# Altium PCB pcb.PcbDoc
Units mil, origin at the board's own origin, x right, y up, seen from the top; angles counter-clockwise.
Board outline 1250 x 3750 mil, 2 copper layers (Top Layer, Bottom Layer), stack 60.477 mil thick; 9 components, 36 nets, 96 pads, 102 vias.
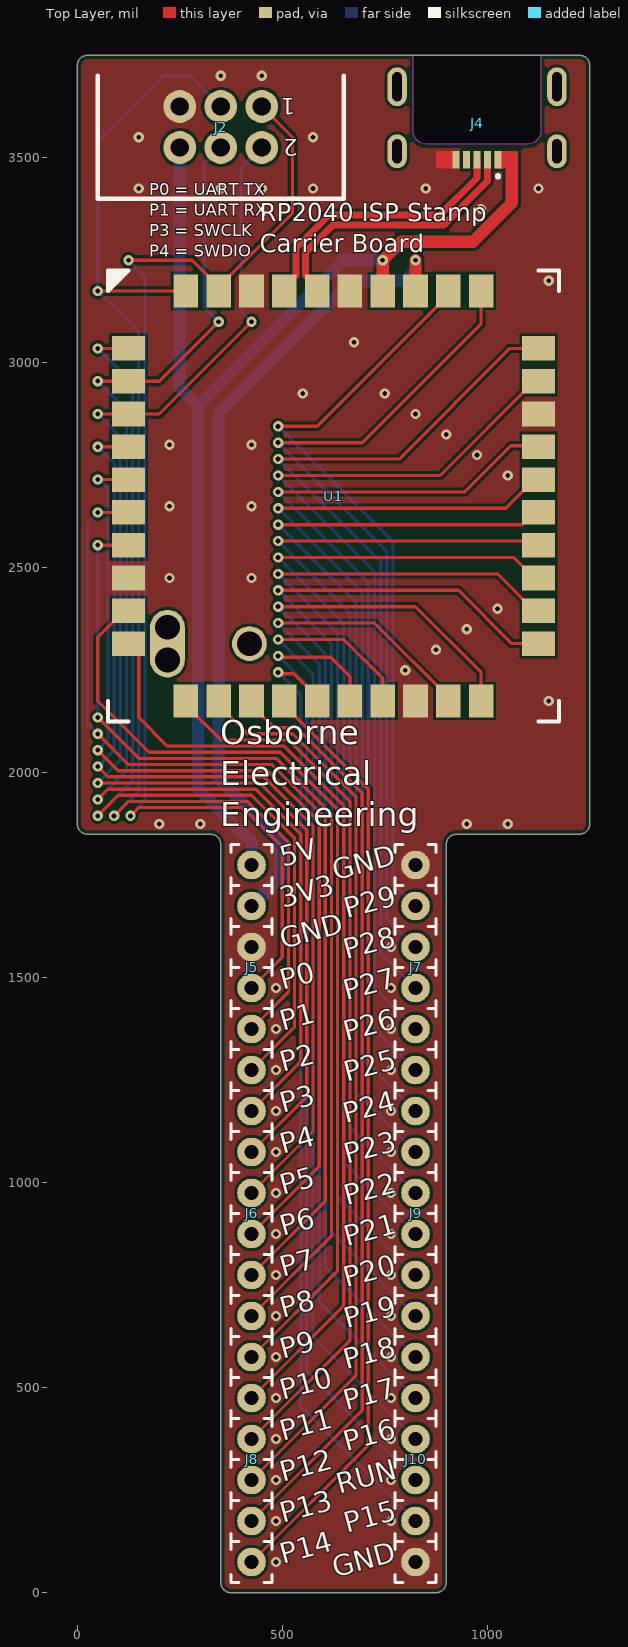
[diagram p0: Top Layer view]
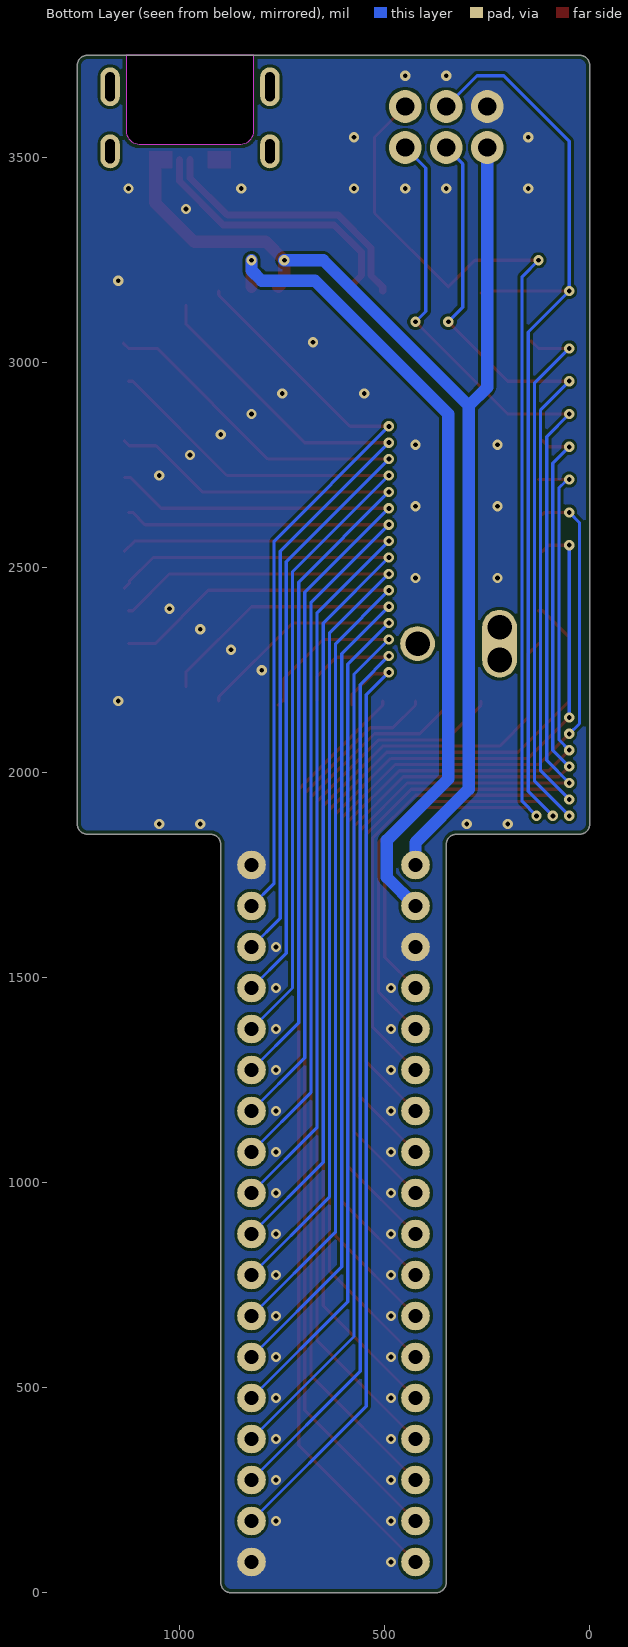
[diagram p1: Bottom Layer view, seen from below]

## Layer stack, top to bottom
Top Solder: solder mask 0.8, Solder Resist, Dk 3.8
Top Layer: signal copper 1.4
Dielectric 1: dielectric 57.677, 7628, Dk 4.6
Bottom Layer: signal copper 1.4
Bottom Solder: solder mask 0.8, Solder Resist, Dk 3.8

## Board outline
325,1850 cw(c325,1825) 350,1825 350,25 ccw(c375,25) 375,0 875,0 ccw(c875,25) 900,25 900,1825 cw(c925,1825) 925,1850 1225,1850 ccw(c1225,1875) 1250,1875 1250,3725 ccw(c1225,3725) 1225,3750 25,3750 ccw(c25,3725) 0,3725 0,1875 ccw(c25,1875) 25,1850

## Design rules (kind name [scope] priority, off if disabled: settings)
BoardOutlineClearance [All] p1: gap=10 ignorepadtopadclearanceinfootprint=FALSE
Clearance [All] p1: gap=7.5 ignorepadtopadclearanceinfootprint=FALSE except(5: Arc-Arc Arc-Track Track-Track)
DiffPairsRouting Netclass_90OHM [InDifferentialPairClass('90OHM')] p1: maxlimit=6 minlimit=6 mostfreqgap=6.4 toplayer_minwidth=19 toplayer_maxwidth=19 toplayer_prefwidth=17.3 bottomlayer_minwidth=19 bottomlayer_maxwidth=19 bottomlayer_prefwidth=17.3 impedanceprofiledriven=TRUE impedanceprofileid={8D4A3107-0771-4565-9AB7-8A6C0ED4A615} impedanceprofilevalue=90.000000 maxuncoupledlength=500
DiffPairsRouting Default_DiffPair [All] p2: maxlimit=10 minlimit=10 mostfreqgap=10 toplayer_minwidth=15 toplayer_maxwidth=15 toplayer_prefwidth=15 bottomlayer_minwidth=15 bottomlayer_maxwidth=15 bottomlayer_prefwidth=15 maxuncoupledlength=500
HoleSize [All] p1: absolutevalues=TRUE maxlimit=200 minlimit=8 maxpercent=80.000 minpercent=20.000
MinimumAnnularRing [All] p1: minimumring=6
MinimumSolderMaskSliver [All] p1: minsoldermaskwidth=4
PasteMaskExpansion [All] p1: expansion=-99999 usepaste=FALSE
PolygonConnect [All] p1: connectstyle=Direct reliefconductorwidth=20 reliefentries=4 polygonreliefangle="90 Angle" airgapwidth=10
RoutingVias [All] p1: holewidth=12 width=24 viastyle="Through Hole" minholewidth=8 minwidth=20 maxholewidth=35 maxwidth=70
SilkToSilkClearance [All] p1: silktosilkclearance=4
SilkToSolderMaskClearance [IsPad] p1: minsilkscreentomaskgap=5 clearancetoexposedcopper=FALSE
SolderMaskExpansion [All] p1: expansion=2 istentingtop=FALSE
UnRoutedNet [All] p1: checkbadconnections=TRUE
Width Default_Width [All] p1: maxlimit=100 minlimit=3.5 preferedwidth=10
23 further rules are at their usual default settings.

## Classes and differential pairs
differential pair class 90ohm: USB
differential pair USB: +USB_P -USB_N

## Components (designator, comment, footprint, x,y, rotation, side; value= is the part's Value field where it differs from the comment)
J2 "BOX_HEADER" BOX_HEADER 350,3575 r180 top
J4 "MICRO_USB_B" MICRO_USB_B 975,3750 r180 top
J5 "HEADER" HEADER_1X6 425,1775 r270 top
J6 "HEADER" HEADER_1X6 425,1175 r270 top
J7 "HEADER" HEADER_1X6 825,1775 r270 top
J8 "HEADER" HEADER_1X6 425,575 r270 top
J9 "HEADER" HEADER_1X6 825,1175 r270 top
J10 "HEADER" HEADER_1X6 825,575 r270 top
U1 "RP2040_ISP_STAMP" RP2040_ISP_STAMP 625,2675 r0 top

## Footprints (in the part's own frame and the unit in brackets; to place one, negate y for a bottom-side part, rotate by r counter-clockwise, add the part's x,y. Pads: shape width x height; smd on the part's side, far side on the other; paste and mask are expansions set on the pad)
BOX_HEADER [mil]
  round 80 hole 45 paste-100: 1(-100,-50) 2(-100,50) 3(0,-50) 4(0,50) 5(100,-50) 6(100,50)
  silkscreen extent -300,-125 300,175
HEADER_1X6 [mil]
  round 70 hole 35: 1(0,0) 2(100,0) 3(200,0) 4(300,0) 5(400,0) 6(500,0)
  silkscreen extent -50,-50 550,50
MICRO_USB_B [mm]
  oval 1.2x2.1 hole 0.6 slot 1.5 at 90 deg paste-2.54: 0(-4.95,5.95) 0(4.95,5.95)
  oval 1.2x2.4 hole 0.6 slot 1.8 at 90 deg paste-2.54: 0(-4.95,1.95) 0(4.95,1.95)
  rect 0.445x1.105 smd paste-2.54: 1(-1.3,6.47) 2(-0.65,6.47) 3(0,6.47) 4(0.65,6.47) 5(1.3,6.47)
  Keep-Out Layer board cut-out: -3.95,0 -3.95,4.7 -3.889,5.006 -3.716,5.266 -3.456,5.439 -3.15,5.5 -3.15,5.5 -3.152,5.5 3.152,5.5 3.15,5.5 3.456,5.439 3.716,5.266 3.889,5.006 3.95,4.7 3.95,4.7 3.95,0
  silkscreen extent -1.4,7.4 -1.2,7.6
RP2040_ISP_STAMP [mil]
  round 85 hole 60 paste-100: 0(-405,-400) 0(-405,-320) 0(-205,-360)
  oval 85x160 smd paste-100: 0(-405,-360)
  oval 85x160 smd far side paste-100: 0(-405,-360)
  rect 80x60 smd paste-100: 1(-500,360) 2(-500,280) 3(-500,200) 4(-500,120) 5(-500,40) 6(-500,-40) 7(-500,-120) 8(-500,-200) 9(-500,-280) 10(-500,-360) 21(500,-360) 22(500,-280) 23(500,-200) 24(500,-120) 25(500,-40) 26(500,40) 27(500,120) 28(500,200) 29(500,280) 30(500,360)
  rect 60x80 smd paste-100: 11(-360,-500) 12(-280,-500) 13(-200,-500) 14(-120,-500) 15(-40,-500) 16(40,-500) 17(120,-500) 18(200,-500) 19(280,-500) 20(360,-500) 31(360,500) 32(280,500) 33(200,500) 34(120,500) 35(40,500) 36(-40,500) 37(-120,500) 38(-200,500) 39(-280,500) 40(-360,500)
  silkscreen extent -550,-550 550,550, body extent -525,-525 525,525, height 147

## Part data
J2: "Connector Header Through Hole 6 position 0.100\" (2.54mm)", Supplier Part Number 1=732-5394-ND, Supplier 1=Digi-Key
J4: "USB - micro B Receptacle Connector 5 Position Board Edge, Cutout; Surface Mount, Right Angle", Supplier Part Number 1=WM1398CT-ND, Supplier 1=Digi-Key

## Via types
v1: diameter 25, hole 12, Top Layer to Bottom Layer, tented both sides, 102 vias

## Nets (pads, with @x,y where several pads share a name; then routed paths per layer and width w, separated by ;. In a path a pad name is that pad's centre, name@x,y a point inside that pad or via, vN(x,y) a via of type N, cw(c..) or ccw(c..) an arc to the next point about the centre after c; other vN are vias at no path point)
3V3: J5.2 U1.33 | length 2005.7
  Top Layer w30: U1.33@825,3185.35 v1(825,3250)
  Bottom Layer w30: J5.2 495,1745 495,1835 345,1985 345,2875 670,3200 800,3200 825,3225 v1(825,3250)
5V: J2.6 J4.1 J5.1 U1.34 | length 2968.6
  Top Layer w30: U1.34@760,3185 745,3200 v1(745,3250) 790,3295 965,3295 1059.93,3389.93 1059.93,3494.93
  Bottom Layer w30: J2.6 250,2940 295,2895 ; J5.1 425,1830 295,1960 295,2895 ; v1(745,3250) 650,3250 295,2895
GND: J2.5 J4.5 J5.3 J7.1 J10.6 U1.8 U1.18 U1.28 U1.35 U1.38
  other v1: 485,75 485,175 765,175 485,275 765,275 485,375 765,375 485,475 765,475 485,575 765,575 485,675 765,675 485,775 765,775 485,875 765,875 485,975 765,975 485,1075 765,1075 485,1175 765,1175 485,1275 765,1275 485,1375 765,1375 485,1475 765,1475 765,1575 200,1875 300,1875 950,1875 1050,1875 1150,2175 800,2250 875,2300 950,2350 1025,2400 225,2475 425,2475 225,2650 425,2650 1050,2725 975,2775 225,2800 425,2800 900,2825 825,2875 550,2925 750,2925 675,3050 1150,3200 985,3375 150,3425 350,3425 450,3425 575,3425 850,3425 1125,3425 150,3550 575,3550 350,3700 450,3700
GPIO0TX: J2.1 J5.4 U1.39 | length 2972.3
  Top Layer w8: v1(125,3250) 280,3250 345,3185 525,3365 525,3550 J2.1 ; v1(130,1895) 150,1915 405,1915 500,1820 500,1550 J5.4
  Bottom Layer w8: v1(125,3250) 165,3210 165,1930 v1(130,1895)
GPIO1RX: J2.3 J5.5 U1.40 | length 3298.9
  Top Layer w8: v1(50,3175) 260,3175 U1.40@265,3170 ; v1(90,1895) 125,1930 415,1930 515,1830 515,1465 J5.5
  Bottom Layer w8: v1(90,1895) 150,1955 150,3075 v1(50,3175) 50,3540 210,3700 275,3700 J2.3
GPIO2: J5.6 U1.1 | length 2463.8
  Top Layer w8: v1(50,1895) 100,1945 425,1945 530,1840 530,1380 J5.6 ; v1(50,3035) U1.1 142.59,3052.59 142.14,3053.05 U1.1@142.14,3053.25
  Bottom Layer w8: v1(50,1895) 135,1980 135,2950 v1(50,3035)
GPIO3: J2.4 J6.1 U1.2 | length 3164.7
  Top Layer w8: v1(50,1935) 75,1960 435,1960 545,1850 545,1295 J6.1 ; v1(50,2955) 200,2955 v1(345,3100)
  Bottom Layer w8: v1(50,1935) 120,2005 120,2885 v1(50,2955) ; v1(345,3100) 310,3135 310,3484.96 J2.4
GPIO4: J2.2 J6.2 U1.3 | length 3268.4
  Top Layer w8: v1(50,1975) 445,1975 560,1860 560,1210 J6.2 ; v1(50,2875) 200,2875 v1(425,3100)
  Bottom Layer w8: v1(50,1975) 105,2030 105,2820 v1(50,2875) ; v1(425,3100) 400,3125 400,3475 J2.2
GPIO5: J6.3 U1.4 | length 2426.5
  Top Layer w8: v1(50,2015) 75,1990 455,1990 575,1870 575,1125 J6.3 ; v1(50,2795) 100,2795 U1.4@115,2810
  Bottom Layer w8: v1(50,2015) 90,2055 90,2755 v1(50,2795)
GPIO6: J6.4 U1.5 | length 2444.5
  Top Layer w8: v1(50,2055) 100,2005 465,2005 590,1880 590,1040 J6.4 ; v1(50,2715) U1.5
  Bottom Layer w8: v1(50,2055) 75,2080 75,2695 69.34,2700.66 68.94,2700.66 54.6,2715 v1(50,2715)
GPIO7: J6.5 U1.6 | length 2457.3
  Top Layer w8: v1(50,2095) 125,2020 475,2020 605,1890 605,955 J6.5 ; v1(50,2635) 110,2635 U1.6@115,2630
  Bottom Layer w8: v1(50,2095) 25,2120 25,2610 v1(50,2635)
GPIO8: J6.6 U1.7 | length 2464.3
  Top Layer w8: v1(50,2135) 150,2035 485,2035 620,1900 620,870 J6.6 ; v1(50,2555) 100,2555 U1.7@115,2540
  Bottom Layer w8: v1(50,2135) v1(50,2555)
GPIO9: J8.1 U1.9 | length 2373.7
  Top Layer w8: U1.9 115,2395 50,2330 50,2175 175,2050 495,2050 635,1910 635,785 J8.1
GPIO10: J8.2 U1.10 | length 2317.6
  Top Layer w8: U1.10 150,2290 150,2135 220,2065 505,2065 650,1920 650,700 J8.2
GPIO11: J8.3 U1.11 | length 2161.8
  Top Layer w8: U1.11 265,2165 350,2080 515,2080 665,1930 665,615 J8.3
GPIO12: J8.4 U1.12 | length 2208.8
  Top Layer w8: U1.12 345,2165 415,2095 525,2095 680,1940 680,530 J8.4
GPIO13: J8.5 U1.13 | length 2255.9
  Top Layer w8: J8.5 695,445 695,1950 535,2110 480,2110 425,2165 U1.13
GPIO14: J8.6 U1.14 | length 2303
  Top Layer w8: J8.6 710,360 710,1960 505,2165 U1.14
GPIO15: J10.5 U1.15 | length 2346.5
  Top Layer w8: v1(490,2245) 493.25,2241.75 528.25,2241.75 580,2190 U1.15@580,2165
  Bottom Layer w8: v1(490,2245) 545,2190 545,455 J10.5
GPIO16: J10.3 U1.17 | length 2455.8
  Top Layer w8: v1(490,2325) 650,2325 745,2230 U1.17 ; U1.17@747.5,2177.5 U1.17@760,2165
  Bottom Layer w8: v1(490,2325) 575,2240 575,625 J10.3
GPIO17: J10.2 U1.19 | length 2528.3
  Top Layer w8: v1(490,2365) 725,2365 905,2185 U1.19
  Bottom Layer w8: v1(490,2365) 590,2265 590,710 J10.2
GPIO18: J10.1 U1.20 | length 2565
  Top Layer w8: v1(490,2405) 825,2405 985,2245 U1.20@985,2210
  Bottom Layer w8: v1(490,2405) 605,2290 605,795 J10.1
GPIO19: J9.6 U1.21 | length 2597.6
  Top Layer w8: v1(490,2445) 930,2445 1060,2315 U1.21
  Bottom Layer w8: v1(490,2445) 620,2315 620,880 J9.6
GPIO20: J9.5 U1.22 | length 2521
  Top Layer w8: v1(490,2485) 1025,2485 1115,2395 U1.22
  Bottom Layer w8: v1(490,2485) 635,2340 635,965 J9.5
GPIO21: J9.4 U1.23 | length 2467.8
  Top Layer w8: v1(490,2525) 1065,2525 1122.69,2467.31 1122.69,2462.31 U1.23@1135,2450
  Bottom Layer w8: v1(490,2525) 650,2365 650,1050 J9.4
GPIO22: J9.3 U1.24 | length 2384.1
  Top Layer w8: v1(490,2565) 1110,2565 U1.24@1135,2540
  Bottom Layer w8: v1(490,2565) 665,2390 665,1135 J9.3
GPIO23: J9.2 U1.25 | length 2316.2
  Top Layer w8: v1(490,2605) 1085,2605 1115,2635 U1.25
  Bottom Layer w8: v1(490,2605) 680,2415 680,1220 J9.2
GPIO24: J9.1 U1.26 | length 2284.8
  Top Layer w8: v1(490,2645) 1045,2645 1120,2720 U1.26@1135,2720
  Bottom Layer w8: v1(490,2645) 695,2440 695,1305 J9.1
GPIO25: J7.6 U1.27 | length 2245.5
  Top Layer w8: v1(490,2685) 945,2685 1057.69,2797.69 1122.69,2797.69 U1.27@1135,2810
  Bottom Layer w8: v1(490,2685) 710,2465 710,1390 J7.6
GPIO26: J7.5 U1.29 | length 2219
  Top Layer w8: v1(490,2725) 885,2725 1115,2955 U1.29
  Bottom Layer w8: v1(490,2725) 725,2490 725,1475 J7.5
GPIO27: J7.4 U1.30 | length 2193
  Top Layer w8: v1(490,2765) 785,2765 1055,3035 U1.30 U1.30@1137.31,3047.31
  Bottom Layer w8: v1(490,2765) 740,2515 740,1560 J7.4
GPIO28: J7.3 U1.31 | length 2028.9
  Top Layer w8: v1(490,2805) 695,2805 985,3095 U1.31@985,3140
  Bottom Layer w8: v1(490,2805) 755,2540 755,1645 J7.3
GPIO29: J7.2 U1.32 | length 1866.3
  Top Layer w8: v1(490,2845) 585,2845 905,3165 U1.32
  Bottom Layer w8: v1(490,2845) 770,2565 770,1730 J7.2
RUN: J10.4 U1.16 | length 2404.5
  Top Layer w8: v1(490,2285) 493.25,2281.75 618.25,2281.75 665,2235 U1.16
  Bottom Layer w8: v1(490,2285) 560,2215 560,540 J10.4
USB_N: J4.2 U1.36 | length 674.1
  Top Layer w17.3: U1.36 585,3185 556.85,3213.15 556.85,3269.72 623.43,3336.3 893.85,3336.3 1000.59,3443.05 J4.2
USB_P: J4.3 U1.37 | length 673.4
  Top Layer w17.3: U1.37 505,3185 533.15,3213.15 533.15,3279.54 613.61,3360 884.03,3360 974.9,3450.87 974.9,3495.18 J4.3
pads on no net: J4.0 J4.4 U1.0

## Polygon pours and split planes (outlines as drawn)
GND on Top Layer "GND_L01_P000" (solid, remove dead copper, pour order 0): 0,3750 1250,3750 1250,1850 900,1850 900,0 350,0 350,1850 0,1850
GND on Bottom Layer "GND_L02_P001" (solid, remove dead copper, pour order 1): 0,3750 1250,3750 1250,1850 900,1850 900,0 350,0 350,1850 0,1850

## Other copper
Top Layer:
  region net GND: 932.57,3517.03 875,3517.03 875,3473.53 932.57,3473.53
  rectangle net 5V: 1017.43,3473.53 1075,3517.03

## Silkscreen, mask and mechanical layers (free items; w line width, h text height)
Top Overlay:
  text "RP2040 ISP Stamp / Carrier Board" at 445,3255 h75
  text "P0 = UART TX / P1 = UART RX / P3 = SWCLK / P4 = SWDIO" at 175,3249.35 h50
  text "Osborne / Electrical / Engineering" at 349.08,1850 h100
  text "5V" at 505.64,1753.94 h85 r15
  text "GND" at 634.52,1721.28 h85 r15
  text "3V3" at 505.69,1653.75 h85 r15
  text "P29" at 661.81,1628.6 h85 r15
  text "GND" at 505.69,1553.75 h85 r15
  text "P28" at 661.13,1528.41 h85 r15
  text "P0" at 505.69,1453.75 h85 r15
  text "P27" at 661.48,1428.31 h85 r15
  text "P1" at 505.7,1353.71 h85 r15
  text "P26" at 661.05,1328.39 h85 r15
  text "P2" at 505.74,1253.56 h85 r15
  text "P25" at 662.27,1228.72 h85 r15
  text "P3" at 505.69,1153.75 h85 r15
  text "P24" at 660.34,1128 h85 r15
  text "P4" at 505.69,1053.75 h85 r15
  text "P23" at 662.42,1028.76 h85 r15
  text "P5" at 505.61,954.06 h85 r15
  text "P22" at 662.17,928.49 h85 r15
  text "P6" at 505.69,853.75 h85 r15
  text "P21" at 662.01,828.45 h85 r15
  text "P7" at 505.66,753.87 h85 r15
  text "P20" at 660.67,728.29 h85 r15
  text "P8" at 505.69,653.75 h85 r15
  text "P19" at 661.81,628.6 h85 r15
  text "P9" at 505.69,553.75 h85 r15
  text "P18" at 661.13,528.41 h85 r15
  text "P10" at 505.69,453.75 h85 r15
  text "P17" at 661.44,428.46 h85 r15
  text "P11" at 505.7,353.71 h85 r15
  text "P16" at 661.05,328.39 h85 r15
  text "P12" at 505.74,253.56 h85 r15
  text "RUN" at 643.74,223.96 h85 r15
  text "P13" at 505.69,153.75 h85 r15
  text "P15" at 662.23,128.87 h85 r15
  text "P14" at 505.7,53.71 h85 r15
  text "GND" at 634.52,21.28 h85 r15
Board Shape:
  the board outline again, w10

## Text inside footprints (layer, text, board x,y; h text height)
J2: Top Overlay "1" at 531.66,3644.99 h40 r180; Top Overlay "2" at 538.33,3544.99 h40 r180